# Altium PCB OpenSwitch.PcbDoc
Units mil, origin at the board's own origin, x right, y up, seen from the top; angles counter-clockwise.
Board outline 3835 x 2405 mil, 4 copper layers (Top Layer, Internal Plane 1, Internal Plane 2, Bottom Layer), stack 30.634 mil thick; 73 components, 57 nets, 290 pads, 99 vias.
Unrouted connection lines stored in the file: 2.
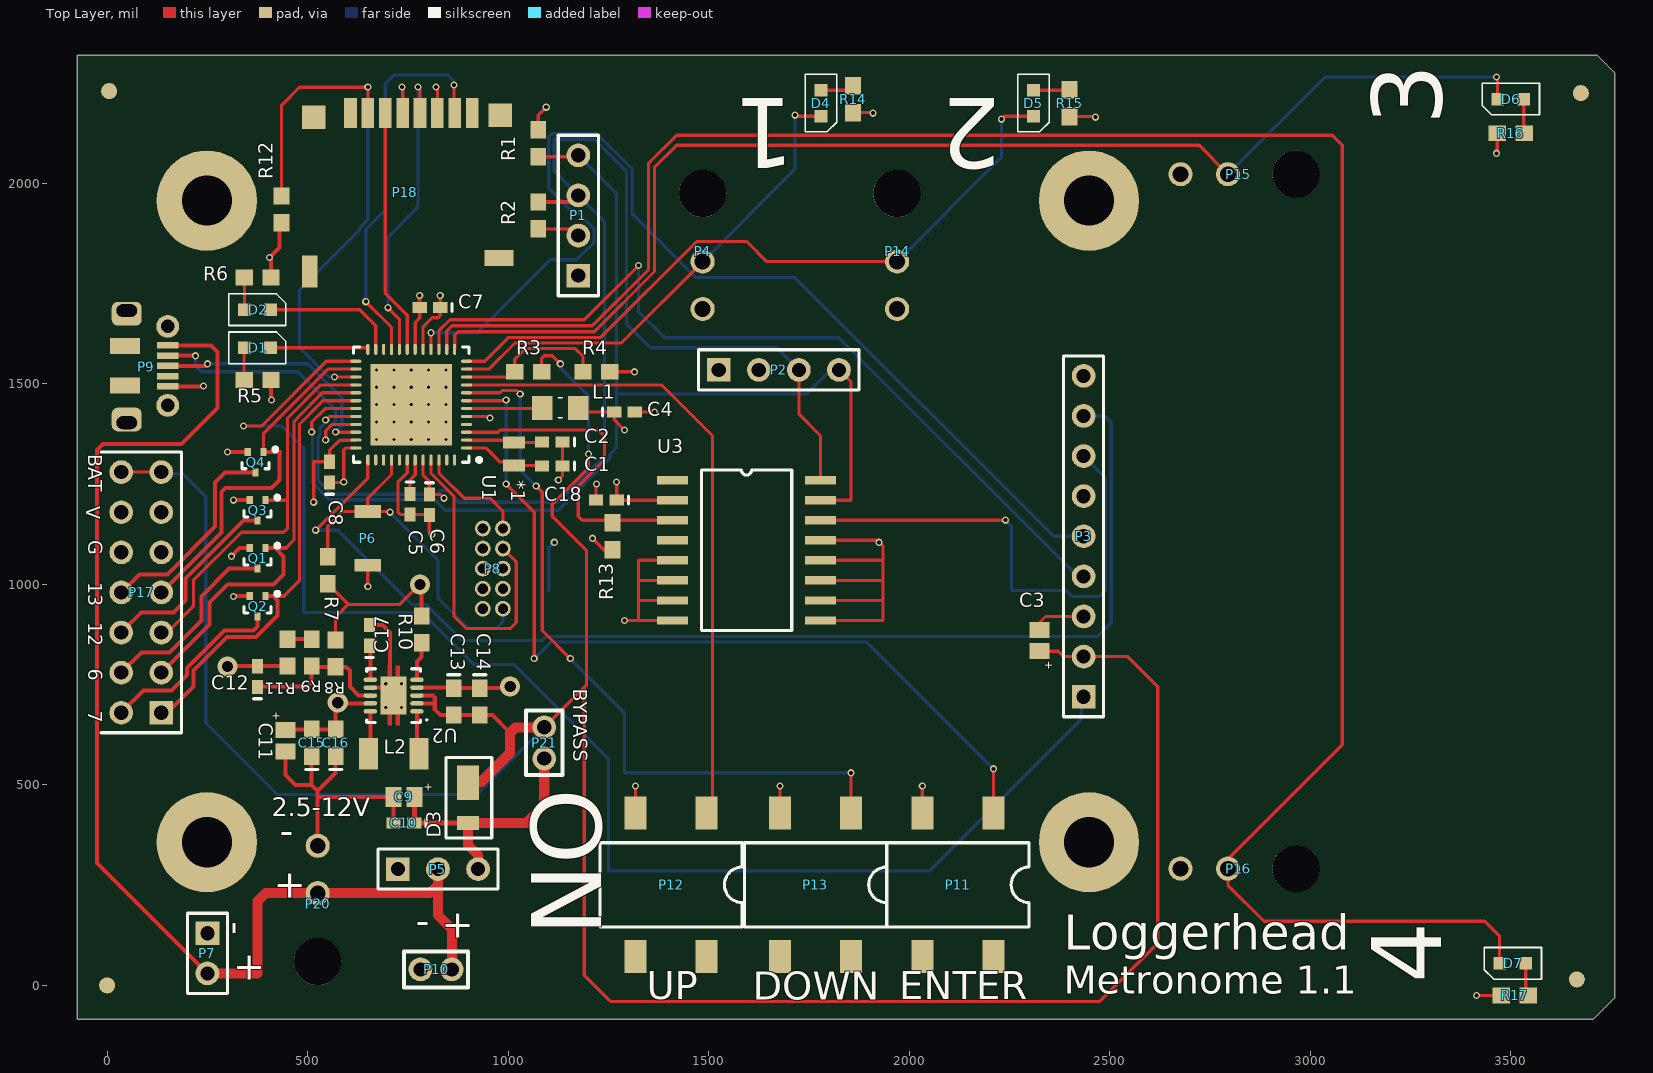
[diagram p0: Top Layer view]
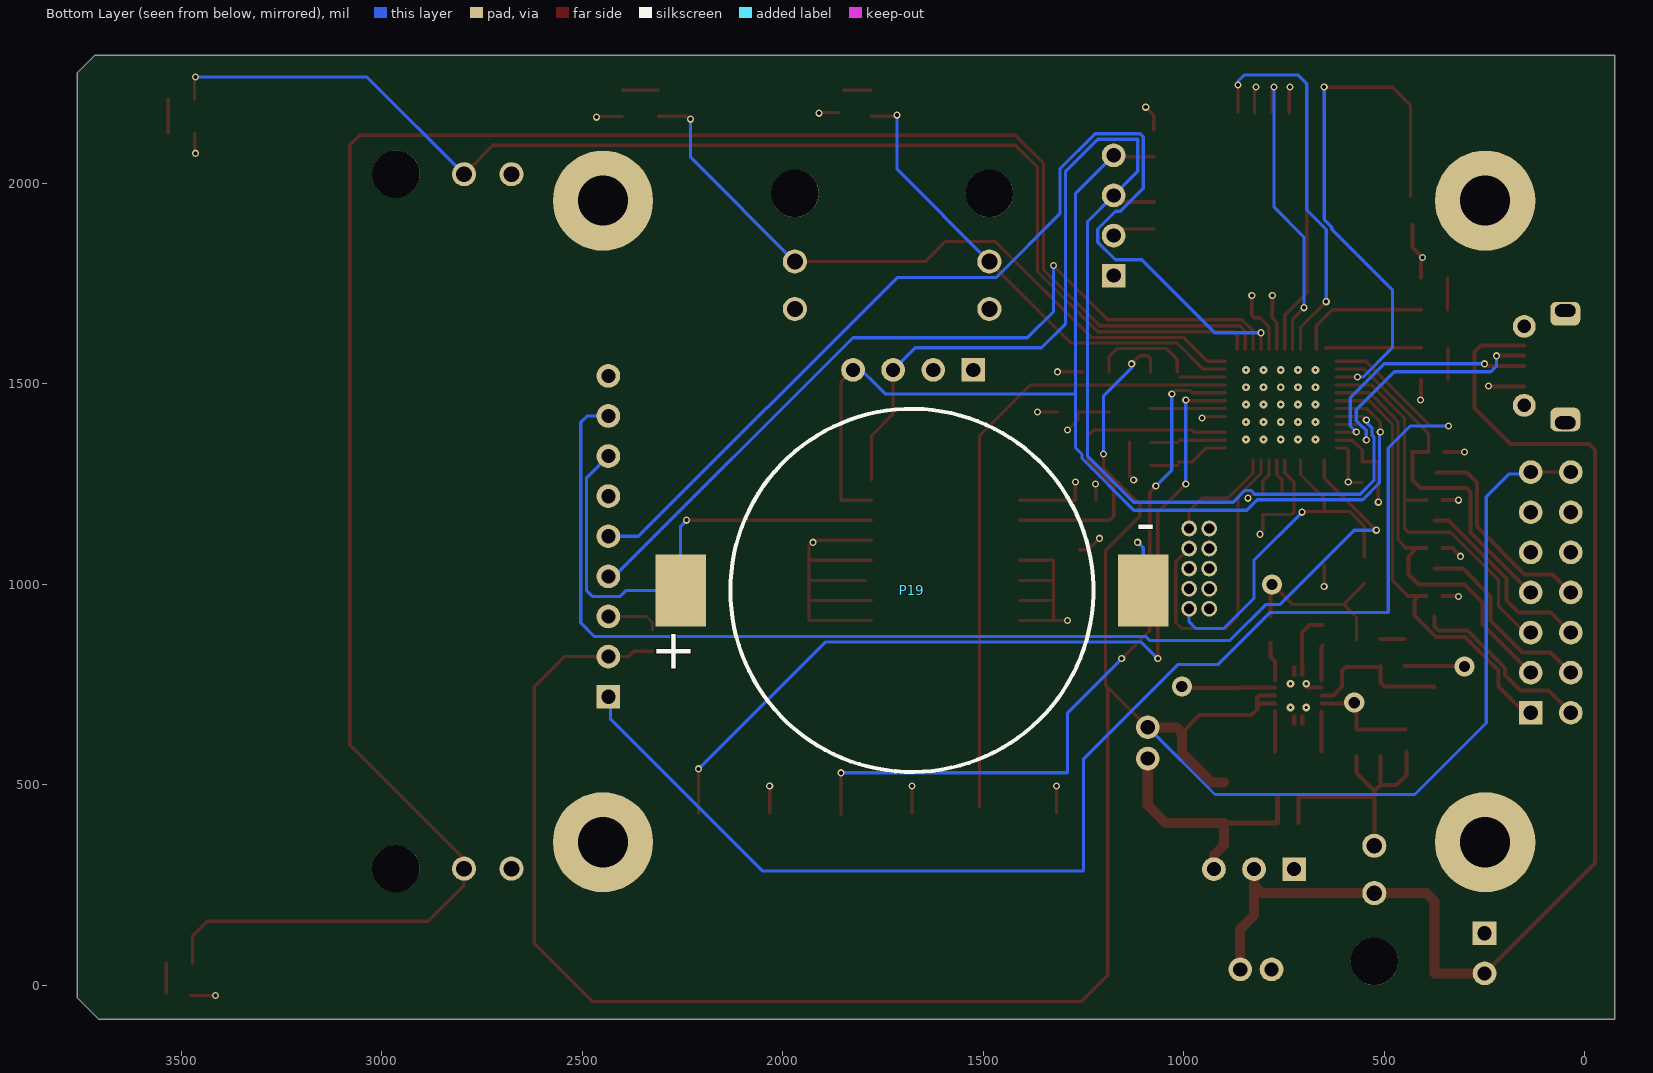
[diagram p1: Bottom Layer view, seen from below]
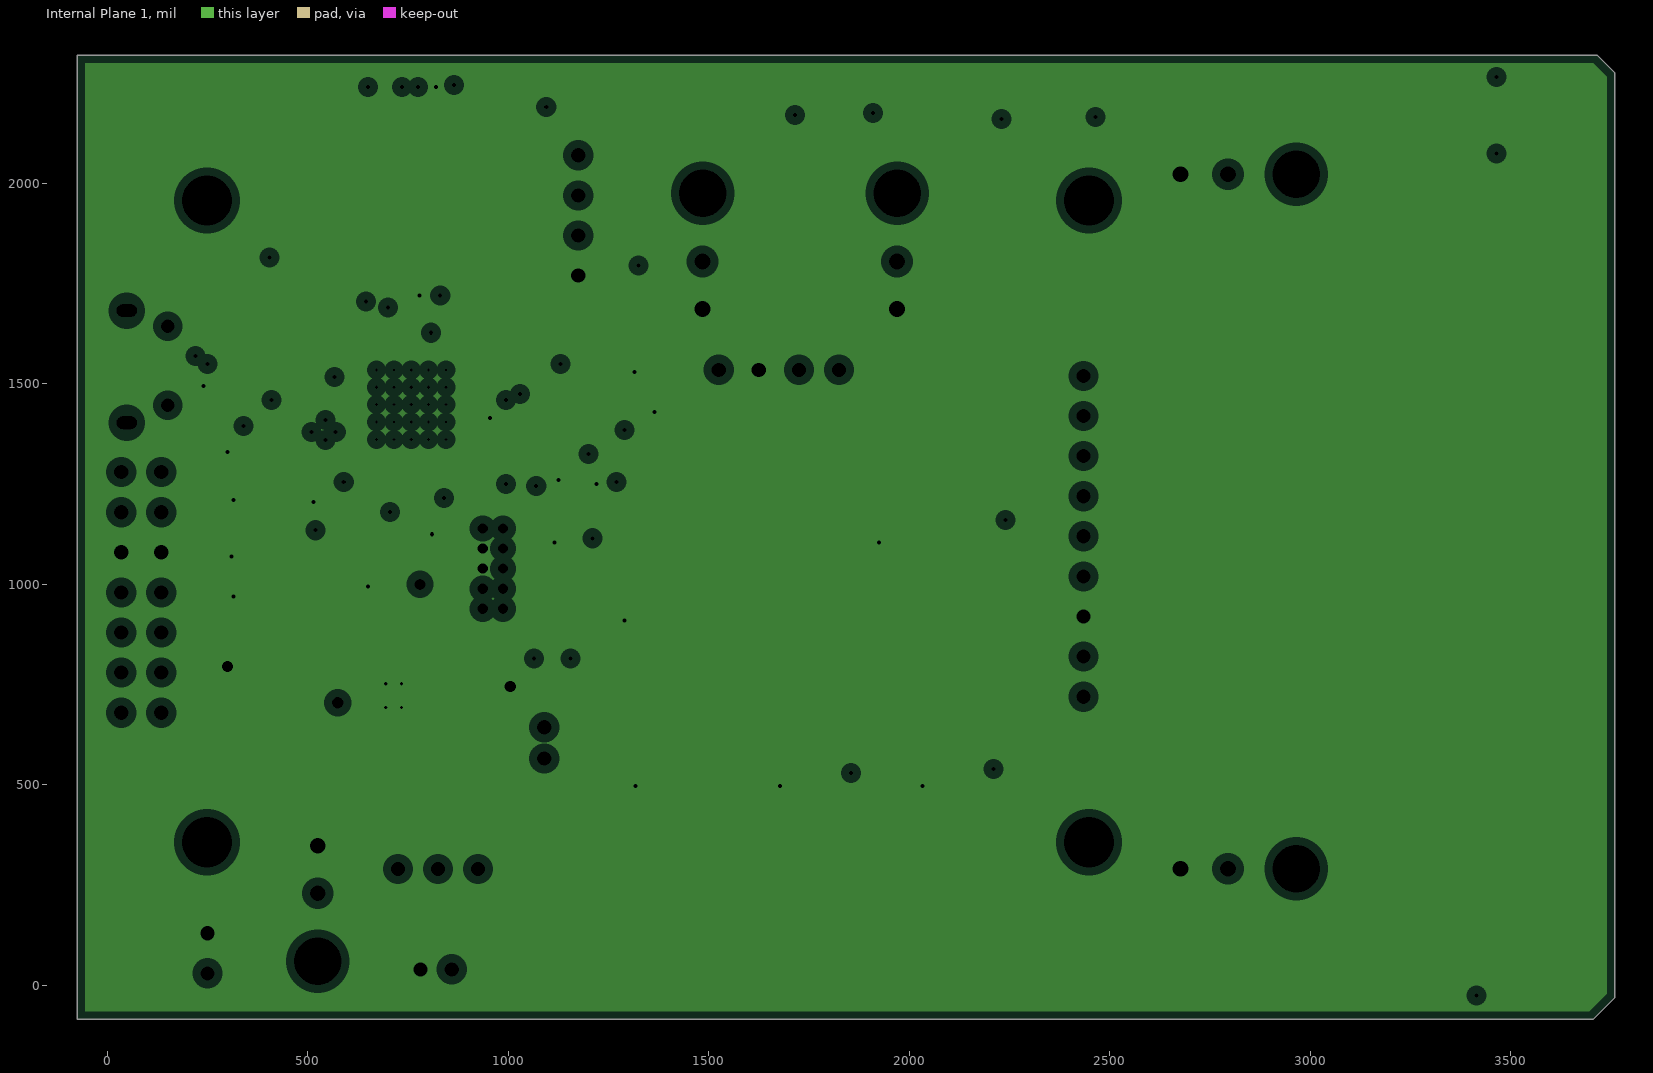
[diagram p2: Internal Plane 1, clearances drawn from the general rule]
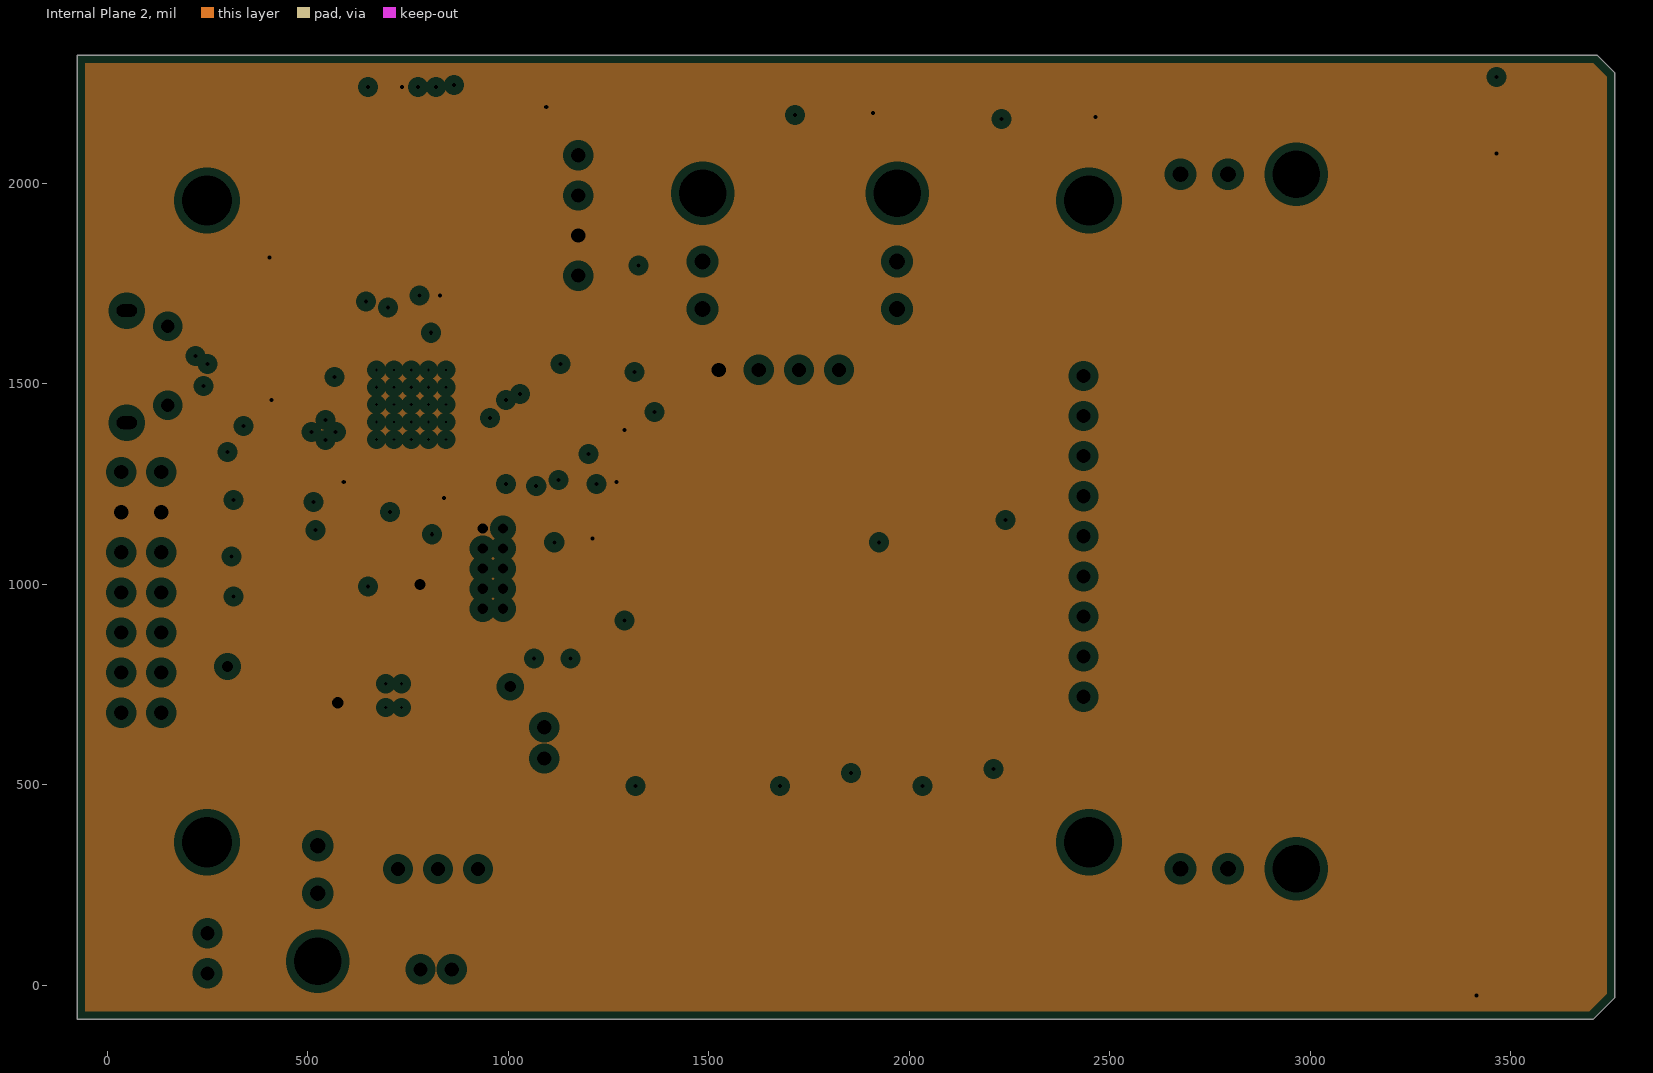
[diagram p3: Internal Plane 2, clearances drawn from the general rule]

## Layer stack, top to bottom
Top Solder: solder mask 0.4, Solder Resist, Dk 3.5
Top Layer: signal copper 1.4
Dielectric 1: core 10, FR-4, Dk 4.2
Internal Plane 1: plane copper 1.417, net DGND
Dielectric 3: prepreg 5, Dk 4.2
Internal Plane 2: plane copper 1.417, net VCC
Dielectric 2: core 10, Dk 4.2
Bottom Layer: signal copper 1.4
Bottom Solder: solder mask 0.4, Solder Resist, Dk 3.5

## Board outline
-75,-85.08 -75,2319.92 3715,2319.92 3760,2274.92 3760,-30.08 3705,-85.08

## Design rules (kind name [scope] priority, off if disabled: settings)
Clearance [All] p1: gap=6
PlaneClearance [All] p1: clearance=20
PlaneConnect [All] p1: planeconnectstyle=Relief reliefexpansion=20 reliefentries=4 reliefconductorwidth=10 reliefairgap=10
PolygonConnect [All] p1: connectstyle=Relief reliefconductorwidth=10 reliefentries=4 polygonreliefangle="90 Angle" airgapwidth=10
RoutingVias [All] p1: holewidth=24 width=12 viastyle="Through Hole" minholewidth=10 minwidth=12 maxholewidth=28 maxwidth=50
SolderMaskExpansion [All] p1: expansion=4
Width [All] p1: maxlimit=50 minlimit=6 preferedwidth=10
27 further rules are at their usual default settings.

## Classes and differential pairs
component class OpenSwitch: *1 C1 C2 C3 C4 C5 C6 C7 C8 C18 D1 D2 D4 D5 D6 D7 L1 P1 P2 P3 P4 P6 P8 P9 P11 P12 P13 P14 P15 P16 P17 P18 P19 Q1 Q2 Q3 Q4 R1 R2 R3 R4 R5 R6 R7 R12 R13 R14 R15 R16 R17 U1 U3
component class OpenSwitch_Power: C9 C10 C11 C12 C13 C14 C15 C16 C17 D3 L2 P5 P7 P10 P20 P21 R8 R9 R10 R11 U2

## Components (designator, comment, footprint, x,y, rotation, side; value= is the part's Value field where it differs from the comment)
*1 "XTAL_ABS06" XTAL-ABS06 1015,1325 r270 top
C1 "22.5pF" 0402 1110,1295 r180 top
C2 "22.5pF" 0402 1110,1355 r180 top
C3 "1uF" Tant0805 2325,859.92 r270 top
C4 "0.1uF" 0402 1290,1430 r0 top
C5 "0.1uF" 0402 755,1200 r270 top
C6 "0.1uF" 0402 803.31,1198.23 r270 top
C7 "0.1 uF" 0402 805,1690 r180 top
C8 "0.1 uF" 0402 555,1280 r90 top
C9 "10uF" Tant0805 740,470 r0 top
C10 "0.1uF" 0402 740,405 r180 top
C11 "47uF" Tant0805 445,610 r90 top
C12 "10pF" 0402 375,770 r90 top
C13 "C0603" 0603 864.33,707.76 r270 top
C14 "C0603" 0603 929.33,707.76 r270 top
C15 "C0603" 0603 510,605 r90 top
C16 "C0603" 0603 570,605 r90 top
C17 "0.1uF" 0402 654.33,872.76 r90 top
C18 "0.1uF" 0402 1245,1209.92 r180 top
D1 "LED_0603" Diode0603 375,1589.92 r0 top
D2 "LED_0603" Diode0603 375,1684.92 r0 top
D3 "Shottky" DFLS130 900,469.92 r270 top
D4 "LED_0603" Diode0603 1780,2200 r270 top
D5 "LED_0603" Diode0603 2310,2200 r270 top
D6 "LED_0603" Diode0603 3500,2210 r180 top
D7 "LED_0603" Diode0603 3505,55 r180 top
L1 "300Ohm" "0805 (M2125) Ferrite" 1130,1440 r0 top
L2 "1uH" Inductor_NLV32T 714.33,577.76 r0 top
P1 "Header 4" HDR1X4 1175,1769.92 r90 top
P2 "Display" HDR1X4 1525,1534.92 r0 top
P3 "GPS" HDR1X9 2435,719.92 r90 top
P4 "MicroFit3_2pin_RT" "Microfit 3 - 2 pin RT" 1485,1804.92 r270 top
P5 "switch" HDR1X3 725,289.92 r0 top
P6 "Tactile" Tactile-B3U-1000 650,1114.92 r90 top
P7 "Molex" HDR1X2 250,129.92 r270 top
P8 "Cortex Debug" Header_2x5_50mil 936.93,939.29 r0 top
P9 "Program" microUSB-B 100,1544.92 r270 top
P10 "JST" HDR_2x1_2mm 860,39.92 r90 top
P11 "pushbutton" SOP4 2210,429.92 r270 top
P12 "pushbutton" SOP4 1495,429.92 r270 top
P13 "pushbutton" SOP4 1855,429.92 r270 top
P14 "MicroFit3_2pin_RT" "Microfit 3 - 2 pin RT" 1970,1804.92 r270 top
P15 "MicroFit3_2pin_RT" "Microfit 3 - 2 pin RT" 2795,2022.91 r180 top
P16 "MicroFit3_2pin_RT" "Microfit 3 - 2 pin RT" 2795,291.02 r180 top
P17 "Header 7X2" HDR2X7 135,679.92 r90 top
P18 "microSD Hirose" "DM3D microSD" 670,2049.92 r270 top
P19 "CoinCellHolder" CoinCellHolder 2255,984.92 r180 bottom
P20 "MicroFit3_2pin_RT" "Microfit 3 - 2 pin RT" 525,229.92 r90 top
P21 "HDR_2x1_2mm" HDR_2x1_2mm 1090,564.92 r0 top
Q1 "DMN5L06TK-7" SOT-523 375,1065 r270 top
Q2 "DMN5L06TK-7" SOT-523 375,945 r270 top
Q3 "DMN5L06TK-7" SOT-523 375,1185 r270 top
Q4 "DMN5L06TK-7" SOT-523 370,1305 r270 top
R1 "4.7k" 3-0603 1075,2100 r90 top
R2 "4.7k" 3-0603 1075,1920 r270 top
R3 "100k" 3-0603 1050,1530 r0 top
R4 "100k" 3-0603 1220,1530 r180 top
R5 "330X" 3-0603 375,1509.92 r180 top
R6 "330X" 3-0603 375,1764.92 r180 top
R7 "10K" 3-0603 550,1035 r90 top
R8 "1M" 3-0603 569.33,827.76 r90 top
R9 "161K" 3-0603 510,830 r270 top
R10 "1M" 3-0603 784.33,887.76 r270 top
R11 "0X" 3-0603 450,830 r90 top
R12 "10k" 3-0603 435,1934.92 r90 top
R13 "10k" 3-0603 1260,1120 r90 top
R14 "330X" 3-0603 1860,2210 r90 top
R15 "330X" 3-0603 2400,2200 r90 top
R16 "330X" 3-0603 3500,2125 r0 top
R17 "330X" 3-0603 3510,-25 r0 top
U1 "ATSAMD21GA-MUT" QFN127P600-8N 758.31,1448.23 r180 top
U2 "Buck-Boost 2.5-12V" TPS63060 714.33,722.76 r180 top
U3 "DS3231" DS3231 1410,1259.92 r0 top

## Footprints (in the part's own frame and the unit in brackets; to place one, negate y for a bottom-side part, rotate by r counter-clockwise, add the part's x,y. Pads: shape width x height; smd on the part's side, far side on the other; paste and mask are expansions set on the pad)
3-0603 [mm] "Chip Resistor; Body 1.6 x 0.9 mm (LxW typ)"
  rect 1.1x1 smd: 1(-0.85,0) 2(0.85,0)
0402 [mm] "Chip Capacitor; Body 1.0 x 0.5 mm (LxW typ)"
  rect 0.9x0.7 smd: 1(-0.65,0) 2(0.65,0)
  silkscreen extent -1.4,-0.25 -1.4,0.25
0603 [mm] "Chip Capacitor; Body 1.6 x 0.8 mm (LxW typ)"
  rect 1.1x1 smd: 1(-0.85,0) 2(0.85,0)
  silkscreen extent -1.7,-0.4 -1.7,0.4
"0805 (M2125) Ferrite" [mm] "Chip Resistor; Body 2.0 x 1.3 mm (LxW typ)"
  rect 1.3x1.5 smd: 1(-1.15,0) 2(1.15,0)
  silkscreen extent -0.13,-0.64 0.13,0.64, body extent -1.15,-0.72 1.15,0.73, height 0.81
CoinCellHolder [mm] "MPD BU2032SM-BT-GTR"
  rect 3.2x4.572 smd: 1(0,0) 2(29.3,0)
  silkscreen extent 3.15,-11.5 26.15,11.5
DFLS130 [mm] "Diode"
  rect 0.9x1.4 smd: A(1.65,0)
  rect 2.2x1.4 smd: K(-0.9,0)
  silkscreen extent -2.5,-1.4 2.6,1.5
Diode0603 [mm]
  rect 0.8x0.8 smd: A(-0.825,0) K(0.825,0)
  silkscreen extent -1.83,-1 1.8,1
"DM3D microSD" [mm] "MICROSD_HIROSE Push-Pull"
  rect 1.5x1.5 smd: 0(-3.048,7.874) 0(-2.921,-3.937)
  rect 1x1.85 smd: 0(6,7.8)
  rect 2x1 smd: 0(6.85,-4.191)
  rect 1.9x0.8 smd: 1(-3.188,-1.601) 2(-3.188,-0.501) 3(-3.188,0.599) 4(-3.188,1.699) 5(-3.188,2.799) 6(-3.188,3.899) 7(-3.188,4.999) 8(-3.188,6.099)
  body extent -3.65,-4.45 7.8,7.5, height 1.55
DS3231 [mm]
  rect 1.98x0.53 smd: 1(0,0) 2(0,-1.27) 3(0,-2.54) 4(0,-3.81) 5(0,-5.08) 6(0,-6.35) 7(0,-7.62) 8(0,-8.89) 9(9.37,-8.89) 10(9.37,-7.62) 11(9.37,-6.35) 12(9.37,-5.08) 13(9.37,-3.81) 14(9.37,-2.54) 15(9.37,-1.27) 16(9.37,0)
  silkscreen extent 1.83,-9.53 7.54,0.64
HDR1X2 [mm] "Connector; Header; 2 Position"
  rect 1.5x1.5 hole 0.9: 1(0,0)
  round 1.5 hole 0.9: 2(2.54,0)
  silkscreen extent -1.27,-1.27 3.81,1.27
HDR1X3 [mm] "Connector; Header; 3 Position"
  rect 1.5x1.5 hole 0.9: 1(0,0)
  round 1.5 hole 0.9: 2(2.54,0) 3(5.08,0)
  silkscreen extent -1.27,-1.27 6.35,1.27
HDR1X4 [mm] "Connector; Header; 4 Position"
  rect 1.5x1.5 hole 0.9: 1(0,0)
  round 1.5 hole 0.9: 2(2.54,0) 3(5.08,0) 4(7.62,0)
  silkscreen extent -1.27,-1.27 8.89,1.27
HDR1X9 [mm] "Connector; Header; 9 Position"
  rect 1.5x1.5 hole 0.9: 1(0,0)
  round 1.5 hole 0.9: 2(2.54,0) 3(5.08,0) 4(7.62,0) 5(10.16,0) 6(12.7,0) 7(15.24,0) 8(17.78,0) 9(20.32,0)
  silkscreen extent -1.27,-1.27 21.59,1.27
HDR2X7 [mm] "Connector; Header; 7x2 Position"
  rect 1.5x1.5 hole 0.9: 1(0,0)
  round 1.5 hole 0.9: 2(0,2.54) 3(2.54,0) 4(2.54,2.54) 5(5.08,0) 6(5.08,2.54) 7(7.62,0) 8(7.62,2.54) 9(10.16,0) 10(10.16,2.54) 11(12.7,0) 12(12.7,2.54) 13(15.24,0) 14(15.24,2.54)
  silkscreen extent -1.27,-1.27 16.51,3.81
HDR_2x1_2mm [mm]
  round 1.5 hole 0.9: 1(0,0.016) 2(0,2)
  silkscreen extent -1.14,-1.02 1.14,3.05
Header_2x5_50mil [mm]
  round 1 hole 0.65: 1(0,0) 2(1.27,0) 3(0,1.27) 4(1.27,1.27) 5(0,2.54) 6(1.27,2.54) 7(0,3.81) 8(1.27,3.81) 9(0,5.08) 10(1.27,5.08)
Inductor_NLV32T [mm]
  rect 1.2x2 smd: 1(-1.6,0) 2(1.6,0)
"Microfit 3 - 2 pin RT" [mm]
  round 3 hole 3: 0(-4.32,0)
  round 1.524 hole 1: 1(0,0) 2(3,0)
microUSB-B [mm]
  rect 0.4x1.35 smd: 1(-1.3,1.3) 2(-0.65,1.3) 3(0,1.3) 4(0.65,1.3) 5(1.3,1.3)
  rrect50% 1.5x1.9 hole 0.8 slot 1.3 at 90 deg copper offset 0.2,0: ""(-3.5,-1.3)
  round 1.45 hole 0.85: ""(-2.5,1.3) ""(2.5,1.3)
  rect 1x1.9 smd: ""(-1.25,-1.4) ""(1.25,-1.4)
  rrect50% 1.5x1.9 hole 0.8 slot 1.3 at 90 deg copper offset -0.2,0: ""(3.6,-1.3)
  body extent -4.1,-4.07 4.1,1.36, height 2.68
QFN127P600-8N [mm]
  oval 0.7x0.2 smd: 1(-3.5,2.75) 2(-3.5,2.25) 3(-3.5,1.75) 4(-3.5,1.25) 5(-3.5,0.75) 6(-3.5,0.25) 7(-3.5,-0.25) 8(-3.5,-0.75) 9(-3.5,-1.25) 10(-3.5,-1.75) 11(-3.5,-2.25) 12(-3.5,-2.75) 25(3.5,-2.75) 26(3.5,-2.25) 27(3.5,-1.75) 28(3.5,-1.25) 29(3.5,-0.75) 30(3.5,-0.25) 31(3.5,0.25) 32(3.5,0.75) 33(3.5,1.25) 34(3.5,1.75) 35(3.5,2.25) 36(3.5,2.75)
  oval 0.2x0.7 smd: 13(-2.75,-3.5) 14(-2.25,-3.5) 15(-1.75,-3.5) 16(-1.25,-3.5) 17(-0.75,-3.5) 18(-0.25,-3.5) 19(0.25,-3.5) 20(0.75,-3.5) 21(1.25,-3.5) 22(1.75,-3.5) 23(2.25,-3.5) 24(2.75,-3.5) 37(2.75,3.5) 38(2.25,3.5) 39(1.75,3.5) 40(1.25,3.5) 41(0.75,3.5) 42(0.25,3.5) 43(-0.25,3.5) 44(-0.75,3.5) 45(-1.25,3.5) 46(-1.75,3.5) 47(-2.25,3.5) 48(-2.75,3.5)
  rect 5.15x5.15 smd paste-1.194: 49(0,0)
  silkscreen extent -4.43,-3.65 3.65,3.65, body extent -3.5,-3.5 3.5,3.5, height 0.85
SOP4 [mm]
  rect 2.1x1.4 smd: 1(0,0) 2(0,-4.5) 3(9.1,-4.5) 4(9.1,0)
  silkscreen extent 1.89,-6.75 7.21,2.25
SOT-523 [mm] "For Diodes Inc MOSFET DMN5L06TK"
  rect 0.51x0.4 smd: 1(-0.65,0.5) 2(-0.65,-0.5) 3(0.65,0)
  silkscreen extent -0.92,-0.85 0.42,1.38, body extent -0.43,-0.85 0.42,0.85, height 0.8
Tactile-B3U-1000 [mm]
  rect 0.8x1.7 smd: 1(-1.7,0) 2(1.7,0)
Tant0805 [mil]
  rect 40x50 smd: 1(-26.5,0) 2(26.5,0)
TPS63060 [mm] "buck-boost 2.5-12V input"
  oval 0.85x0.28 smd paste-0.025 mask+0.07: 1(-1.475,1) 2(-1.475,0.5) 3(-1.475,0) 4(-1.475,-0.5) 5(-1.475,-1) 6(1.475,-1) 7(1.475,-0.5) 8(1.475,0) 9(1.475,0.5) 10(1.475,1)
  rect 1.65x2.4 smd paste-0.825 mask+0.07: 11(0,0)
  Top Layer region: -0.39,-1.9 -0.11,-1.9 -0.11,-1.2 -0.39,-1.2
  Top Layer region: 0.39,-1.2 0.11,-1.2 0.11,-1.9 0.39,-1.9
  Top Layer region: 0.39,1.9 0.11,1.9 0.11,1.2 0.39,1.2
  Top Layer region: -0.39,1.2 -0.11,1.2 -0.11,1.9 -0.39,1.9
  silkscreen extent -2.15,-1.7 1.7,1.7, body extent -1.55,-1.55 1.55,1.55, height 1
XTAL-ABS06 [mm]
  rect 0.75x1.4 smd: 1(-0.725,0) 2(0.725,0)

## Part data
C1 C2 C4 C5 C6 C7 C8 C10 C12 C17 C18: library part C0402, "Ceramic Chip Capacitor - Standard"
C3 C9 C11: library part Tant0805
C13 C14 C15 C16: "Ceramic Chip Capacitor - Standard"
D3: library part DFLS130
L1: library part "Ferrite 0805(M2125) 3A", "Ferrite 25mOhm@DC,  60 Ohm@100MHz"
L2: library part Inductor_NLV32T
P1: "Header, 4-Pin"
P2: library part "Header 4", "Header, 4-Pin"
P3: library part "Header 9", "Header, 9-Pin"
P5: library part "Header 3", "Header, 3-Pin"
P6: library part Tactile_B3U-1000
P7: library part "Header 2", "Header, 2-Pin"
P8: library part CortexDebug
P9: library part microUSB-B
P10: library part HDR_2x1_2mm
P17: "Header, 7-Pin, Dual row"
Q1 Q2 Q3 Q4: library part "FET DMN5L06TK-7", "Ultra-low leakage Enhanced MOSFET"
R1 R2 R3 R4 R5 R6 R7 R8 R9 R10 R11 R12 R13 R14 R15 R16 R17: library part ERJ3RK, "Precision Thick Film Chip Resistor, 10 Ohm to 1M Ohm Range, 1% and 0.5% Tolerance, 0603 Size, 0.063 W"
U1: library part ATSAMD21G18
U2: library part TPS63060, "TPS63060"

## Free pads (board coordinates)
  round 40 smd paste-20 mask+5: 0(0,0) 0(5,2230) 0(3665,15) 0(3675,2225)
  round 250 hole 125: 0(248.58,356.97) 0(248.58,1956.97) 0(2448.58,356.97) 0(2448.58,1956.97)

## Via types
v1: diameter 18, hole 10, Top Layer to Bottom Layer, 66 vias
v2: diameter 19.68, hole 7.87, Top Layer to Bottom Layer, 29 vias
v3: diameter 50, hole 28, Top Layer to Bottom Layer, 4 vias

## Nets (pads, with @x,y where several pads share a name; then routed paths per layer and width w, separated by ;. In a path a pad name is that pad's centre, name@x,y a point inside that pad or via, vN(x,y) a via of type N, cw(c..) or ccw(c..) an arc to the next point about the centre after c; other vN are vias at no path point)
A4: R3.1 R4.2 U1.10 | length 371.7
  Top Layer w8: U1.10 R3.1@1008.74,1517.13 ; R3.1 1016.54,1561.54 1043,1588 1167,1588 1186.54,1568.46 R4.2
BATT_BACK: P3.7 P19.1 U3.14 | length 1247.5
  Top Layer w8: U3.14 v1(2240,1160)
  Bottom Layer w8: v1(2240,1160) 2255,1145 P19.1 2390.08,984.92 2405,970 2475,970 2490,985 2490,1264.92 P3.7
CS: P18.2 R12.2 U1.27 | length 1415.8
  Top Layer w8: R12.2 435,2195 479.72,2239.72 650.28,2239.72 P18.2 ; v1(567.13,1517.13) U1.27
  Bottom Layer w8: v1(567.13,1517.13) 552.87,1517.13 480,1590 480,1735 631,1886 631,1890.8 650,1909.8 v1(650,2240)
D6: P17.3 Q1.1 U1.29 | length 1072.6
  Top Layer w8: 445.59,1090.59 466,1111 466,1405.8 475,1414.8 475,1416.21 536.54,1477.76 U1.29
  Top Layer w10: P17.3 255,899.92 255,955 300,1000 415,1000 440,1025 440,1070 419.41,1090.59 ; Q1.1 419.41,1090.59 ; 445.59,1090.59 419.41,1090.59
D6_GND: P17.4 Q1.3 | length 482.6
  Top Layer w10: P17.4 85.08,830 155,830 235,910 235,970 304.41,1039.41 Q1.3
D7: P17.1 Q2.1 U1.30 | length 1122.7
  Top Layer w8: 440.59,970.59 480,1010 480,1400 538.07,1458.07 U1.30
  Top Layer w10: P17.1 149.92,679.92 215,745 215,785 299,869 371.63,869 425,922.37 425,960 414.41,970.59 ; Q2.1 414.41,970.59 ; 440.59,970.59 414.41,970.59
D7_GND: P17.2 Q2.3 | length 463.8
  Top Layer w10: P17.2 90.08,735 160,735 199,774 199,791.63 292.37,885 365,885 375,895 Q2.3
D12: P17.5 Q3.1 U1.28 | length 981.1
  Top Layer w8: P17.5@149.92,879.92 215,945 215,1010 335,1130 440,1130 450,1140 450,1210 ; Q3.1@395.28,1210 450,1210 ; U1.28 532.44,1497.44 450,1415 450,1210
  Top Layer w10: Q3.1 Q3.1@395.28,1210
D12_GND: P17.6 Q3.3 | length 488.1
  Top Layer w10: P17.6@59.92,879.92 47.42,892.42 85,930 165,930 195,960 195,1015 339.41,1159.41 Q3.3
D13: P17.7 Q4.1 U1.26 | length 924.2
  Top Layer w8: Q4.1 389.68,1375.9 550.6,1536.81 U1.26
  Top Layer w10: P17.7 285,1129.92 285,1230 295,1240 410,1240 430,1260 430,1330 430.59,1330.59 Q4.1
D13_GND: P17.8 Q4.3 | length 523.5
  Top Layer w10: P17.8 80.08,1025 150,1025 269,1144 269,1254 294.41,1279.41 Q4.3
D+: P9.3 U1.34 | length 612.9
  Top Layer w8: v1@570,1379.33 U1.34
  Top Layer w10: P9.3 244.92,1544.92 v1(250,1550)
  Bottom Layer w8: v1(250,1550) 500,1550 585,1465 585,1395 v1(570,1380)
D-: P9.2 U1.33 | length 680.2
  Top Layer w8: v1(545,1360) 545,1382.48 561.54,1399.02 U1.33
  Top Layer w10: P9.2 v1@219.49,1570.51
  Bottom Layer w8: v1(220,1570) 220,1545 235,1530 475,1530 570,1435 570,1408.13 552.87,1391 551,1391 545,1385 v1(545,1360)
DGND: C1.1 C2.1 C3.1 C4.2 C5.2 C6.2 C7.2 C8.2 C9.1 C10.2 C11.1 C12.2 C13.1 C14.1 C15.1 C16.1 C17.2 C18.2 P1.1 P2.2 P3.3 P4.2 P6.1 P7.1 P8.5 P8.7 P9.5 P10.2 P11.2 P12.2 P13.2 P14.2 P15.2 P16.2 P17.9 P17.10 P18.6 P19.2 P20.2 Q1.2 Q2.2 Q3.2 Q4.2 R4.1 R11.1 U1.5 U1.18 U1.35 U1.42 U2.4 U2.7 U2.11 U3.5 U3.6 U3.7 U3.8 U3.9 U3.10 U3.11 U3.12 U3.13 | length 4581.5
  Top Layer w8: v1(515,1205) 515,1305 515.59,1305.59 C8.2 555,1335 579.65,1359.65 U1.35 ; v1(650,995) P6.1 ; U1.42 748.46,1278.46 725,1255 725,1180 730.59,1174.41 C5.2 801.54,1174.41 C6.2 803.31,1131.69 v1(810,1125) ; U1.18 768.15,1653.15 779.41,1664.41 C7.2 ; P18.6 v1@823.5,2236.5 ; U1.5 v1@955,1418.7 ; v1(1125,1260) 1135.59,1270.59 C1.1 C2.1 ; C18.2 v1@1219.41,1244.41 ; R4.1 v1(1315,1530) ; v1@1290.08,909.92 U3.8 ; C4.2 v1(1365,1430) ; P12.2 v1(1317.83,497.17) ; 1324.92,910 1324.92,959.92 ; 1330.08,1009.92 U3.6 ; U3.7 1324.92,959.92 ; U3.5 1324.92,1059.92 1324.92,959.92 ; P13.2 v1(1677.83,497.17) ; U3.9 1934.92,909.92 1934.92,959.92 ; U3.10 1934.92,959.92 ; U3.12 1934.92,1059.92 ; U3.13 1919.92,1109.92 1934.92,1094.92 1934.92,959.92 ; U3.11@1793.98,1010 1935,1010 ; P11.2 v1(2032.83,497.17) ; C3.1 2325,905 2339.92,919.92 P3.3
  Top Layer w10: P9.5 v1@243.74,1493.74 ; v3(300,795) 301.54,796.54 R11.1 ; v1@304.41,1330.59 Q4.2 ; v1(310,1070) 330.59,1090.59 Q1.2 ; v1(315,970) 315.59,970.59 Q2.2 ; v1@315.59,1210.59 Q3.2 ; C11.1 445,525 470,500 510,500 ; C15.1 510,500 ; P20.2 525,470 ; C16.1 570,530 525,485 ; C17.2 686.65,898.35 705,880 705,780 ; U2.7 U2.11@694.65,742.44 ; C9.1 525,470 ; C10.2 C9.1@714.41,469.09 ; U2.4 C13.1@863.11,742.44 ; C7.2 v1(779.41,1720.59) ; C13.1 C14.1 v3@1001.22,741.22 ; 510,500 525,485 ; 525,470 525,485
  Bottom Layer w8: P19.2 1101.46,1091.46 v1(1115,1105)
  other v1: 1290,910 1925,1105 315,1210 1220,1250 300,1330 955,1415 240,1495 820,2240
  other v2: 694.65,693.23 734.02,693.23 694.65,752.28 734.02,752.28
  other v3: 1005,745
DN-TX: P13.1 U1.8 | length 1862.5
  Top Layer w8: U1.8 979.31,1477.76 985,1483.44 1021.56,1483.44 v1(1030,1475) ; v1(1070,1245) 1085,1230 1085,885 v1(1155,815) ; P13.1@1855,424.92 P13.1 v1(1855,530)
  Bottom Layer w8: v1(1030,1475) 1030,1285 v1(1070,1245) ; v1(1155,815) 1290,680 1290,530 v1(1855,530)
ENT-RST: P11.1 U1.7 | length 2165.8
  Top Layer w8: U1.7 v1@990,1458.07 ; v1(995,1250) 1065,1180 v1(1065,815) ; P11.1 v1(2210,540)
  Bottom Layer w8: v1@995,1255 v1(995,1460) ; v1(1065,815) 1106,856 1894,856 v1(2210,540)
GPSEN: P3.8 U1.37 | length 2921
  Top Layer w8: v1(520,1135) 650.04,1265.04 U1.37
  Bottom Layer w8: v1(520,1135) 575,1135 760,950 795,950 885,860 1085,860 1095,870 2470,870 2504,904 2504,1404 2488.08,1419.92 P3.8
INT: R13.2 U1.3 U3.3 | length 818.6
  Top Layer w8: U1.3 974.33,1379.33 980,1385 1225,1385 1240,1370 1240,1310.2 1175,1245.2 1175,1170 1185.08,1159.92 U3.3
LED1: D1.K U1.24 | length 238.7
  Top Layer w8: D1.K U1.24@646.14,1589.92
LED2: D2.K U1.23 | length 337.9
  Top Layer w8: D2.K 630.08,1684.92 669.72,1645.28 U1.23
MISO: P18.7 U1.21 | length 973.5
  Top Layer w8: v1(645,1705) 709.09,1640.91 U1.21 ; P18.7@865,2177.24 v1(865,2245)
  Bottom Layer w8: v1(645,1705) 645,1885 693.58,1933.58 693.58,2248.58 715,2270 850,2270 865,2255 v1(865,2245)
MOSI: P18.3 U1.19 | length 612.1
  Top Layer w8: P18.3 693.58,1726.42 748.46,1671.54 U1.19
Net*1_1: *1.1 C2.2 U1.2 | length 183
  Top Layer w8: U1.2 *1.1@1011.18,1359.65 ; *1.1 C2.2@1082.95,1353.54
Net*1_2: *1.2 C1.2 U1.1 | length 199.8
  Top Layer w8: U1.1 945.04,1339.96 980,1305 1012.99,1305 *1.2@1013.31,1304.69 ; *1.2 C1.2@1082.95,1296.46
NetC5_1: C5.1 U1.43 | length 90.3
  Top Layer w8: C5.1 755,1260 768.15,1273.15 U1.43
NetC12_1: C12.1 R8.1 R9.2 U2.8 | length 371
  Top Layer w10: C12.1 375.59,745 500,745 510,755 R9.2 ; R9.2@519.29,794.29 R8.1 595.71,794.29 605,785 605,745 627.24,722.76 U2.8
NetC17_1: C17.1 U2.6 | length 85.8
  Top Layer w10: C17.1 656.26,845.24 U2.6
NetD1_A: D1.A R5.2 | length 79
  Top Layer w8: R5.2 D1.A@341.54,1588.94
NetD2_A: D2.A R6.2 | length 79
  Top Layer w8: D2.A R6.2@342.52,1763.94
NetD4_A: D4.A R14.2 | length 69
  Top Layer w8: D4.A R14.2@1849.02,2232.48
NetD5_A: D5.A R15.2 | length 89
  Top Layer w8: D5.A R15.2@2399.02,2232.48
NetD6_A: D6.A R16.2 | length 84
  Top Layer w8: R16.2@3532.48,2125.98 D6.A
NetD7_A: D7.A R17.2 | length 74
  Top Layer w8: R17.2@3537.48,-19.02 D7.A
NetL1_1: L1.1 U1.6 | length 188.6
  Top Layer w8: U1.6 L1.1@1084.72,1438.39
NetL2_1: L2.1 U2.10 | length 100.7
  Top Layer w10: L2.1@656.26,582.68 U2.10
NetL2_2: L2.2 U2.1 | length 100.7
  Top Layer w10: L2.2@772.4,582.68 U2.1
NetR9_1: R9.1 R11.2 | length 60
  Top Layer w10: R11.2 R9.1
NetR10_2: R10.2 U2.5 | length 97.1
  Top Layer w10: U2.5 772.4,807.4 784.33,819.33 R10.2
PB02: U1.47
PPS: P3.1 U1.25 | length 3510.8
  Top Layer w8: v1(340,1395) 385,1395 546.5,1556.5 U1.25
  Bottom Layer w8: v1(340,1395) 435,1395 490,1340 490,930 785,930 915,800 1015,800 1250,565 1250,290 ; 1250,285 2050,285 2430,665 2430,714.92 P3.1
RELAY1: D4.K P4.1 U1.11 | length 1222.8
  Top Layer w8: U1.11 951.81,1536.81 1017,1602 1282.08,1602 P4.1 ; v1@1717.48,2167.52 D4.K
  Bottom Layer w8: P4.1 1715,2034.92 v1(1715,2170)
RELAY2: D5.K P14.1 U1.12 | length 1764.2
  Top Layer w8: U1.12 941.5,1556.5 1001,1616 1231,1616 1470,1855 1595,1855 1645.08,1804.92 P14.1 ; v1(2230,2160) 2237.52,2167.52 D5.K
  Bottom Layer w8: P14.1 2230,2064.92 v1(2230,2160)
RELAY3: D6.K P15.1 U1.13 | length 3154.9
  Top Layer w8: U1.13 866.57,1621.57 875,1630 1214.8,1630 1365,1780.2 1365,2040 1420,2095 2722.91,2095 P15.1 ; D6.K v1@3467.52,2262.48
  Bottom Layer w8: P15.1 3037.09,2265 3455,2265
  other v1: 3465,2265
RELAY4: D7.K P16.1 U1.14 | length 5407.6
  Top Layer w8: U1.14 846.89,1631.89 860,1645 1210,1645 1350,1785 1350,2050 1420,2120 3055,2120 3080,2095 3080,600 2795,315 P16.1 2795,250 2885,160 3435.04,160 3472.52,122.52 D7.K
RESET: P6.2 P8.2 R7.2 U1.40 | length 896.9
  Top Layer w8: R7.2 550,1145 586.85,1181.85 P6.2 ; v1@705,1181.85 P6.2 ; U1.40 709.09,1274.09 650,1215 P6.2
  Bottom Layer w8: v1(705,1180) 825,1060 825,965 900,890 970,890 986.93,906.93 P8.2
RXD: P3.5 U1.16 | length 2676.9
  Top Layer w8: U1.16 v1(807.52,1627.48)
  Bottom Layer w8: v1(807.52,1627.48) 922.48,1627.48 1104.45,1809.45 1170.43,1809.45 1214.53,1853.55 1214.53,1886.29 1170.43,1930.39 1158.63,1930.39 1101,1988.02 1101,2115.8 1109.2,2124 1220.8,2124 1309,2035.8 1309,1924.35 1468.43,1764.92 1715.08,1764.92 2360.08,1119.92 P3.5
SCK: P18.5 U1.20 | length 761.3
  Top Layer w8: v1@695,1690 v1(700,1690) 728.78,1661.22 U1.20 ; P18.5 v1@780.2,2234.8
  Bottom Layer w8: v1(700,1690) 700,1865 775,1940 v1(775,2240)
SCL: P1.3 P2.3 R2.1 U1.32 U3.16 | length 3322.9
  Top Layer w8: v1(545,1410) 553.7,1418.7 U1.32 ; P2.3 1725,1425 1778.9,1371.1 U3.16
  Top Layer w10: R2.1 P1.3@1158.54,1953.46
  Bottom Layer w8: v1(545,1410) 545,1404.8 531,1390.8 531,1372.87 526,1367.87 526,1259 560,1225 823.13,1225 832.13,1234 847.87,1234 876.87,1205 1125,1205 1240,1320 1240,1904.92 P1.3 1115,2029.92 1115,2110 1215,2110 1295,2030 1295,1650 1355,1590 1669.92,1590 P2.3
SDA: P1.4 P2.4 R1.1 U1.31 U3.15 | length 3020.7
  Top Layer w8: v1(510,1380) 510,1405 543.39,1438.39 U1.31 ; R1.1 P1.4@1171.61,2066.54 ; U3.15 1854.92,1209.92 1854.92,1505 P2.4
  Bottom Layer w8: v1(510,1380) 512,1378 512,1253.2 554.2,1211 817.13,1211 843.13,1185 1124.8,1185 1254,1314.2 1254,1324 1270,1340 1270,1974.92 P1.4 ; 1270,1475 1745,1475 1825,1555 P2.4
SWCLK: P8.8 U1.45 | length 785.9
  Top Layer w8: U1.45 807.52,1277.48 865,1220 865,920 895,890 1005,890 1020,905 1020,1056.22 P8.8
SWDIO: P8.10 U1.46 | length 275.4
  Top Layer w8: U1.46 827.2,1277.8 890,1215 955,1215 986.93,1183.07 P8.10
TXD: P3.4 U1.15 | length 2113.4
  Top Layer w8: U1.15 827.2,1632.2 855,1660 1190,1660 v1(1325,1795) v1@1327.5,1797.5
  Bottom Layer w8: v1(1325,1795) 1325,1680 1390,1615 1825,1615 2420.08,1019.92 P3.4
UP-RX: P12.1 U1.9 | length 1591.8
  Top Layer w8: U1.9 1382.44,1497.44 1509.88,1370 P12.1@1509.88,444.8
V_BATT: P5.2 P7.2 P9.1 P10.1 P20.1 | length 3068.8
  Top Layer w10: P9.1 258.9,1596.1 275,1580 275,1440 185,1350 -10,1350 -25,1335 -25,304.92 P7.2
  Top Layer w25: P7.2 374.92,29.92 374.92,209.92 394.92,229.92 P20.1 804.92,229.92 825,250 ; P5.2 825,250 ; P10.1 859.37,140.63 825,175 825,250
VCC: C4.1 C6.1 C7.1 C8.1 C11.2 C15.2 C16.2 C18.1 L1.2 P1.2 P2.1 P8.9 P17.11 P17.12 P18.4 R1.2 R2.2 R5.1 R6.1 R7.1 R8.2 R10.1 R12.1 R13.1 R14.1 R15.1 R16.1 R17.1 U1.17 U1.36 U1.44 U2.9 U3.2 | length 2140.6
  Top Layer w8: R7.1 601.54,950 ; C8.1 589.41,1254.41 v1(590,1255) 590,1335 594.96,1339.96 U1.36 ; R8.2 569.33,917.8 601.54,950 ; P18.4 v1@736.89,2238.11 ; v3(780,1000) 730,950 601.54,950 ; U1.44 787.83,1272.17 803.31,1256.69 C6.1 831.18,1223.82 v1(840,1215) ; U1.17 787.83,1642.83 810,1665 825,1665 830.59,1670.59 C7.1 v1(830.59,1720.59) ; R2.2 P1.2@1158.39,1886.54 ; R1.2 1075,2170 v1(1095,2190) ; L1.2@1185.28,1430 C4.1 1264.41,1410.59 v1(1290,1385) ; v1(1210,1115) 1238.46,1086.54 R13.1 ; v1@1270.59,1254.41 C18.1 U3.2 ; R14.1 v1@1903.46,2176.54 ; R15.1 v1@2463.46,2166.54 ; v1(3415,-25) R17.1 ; v1@3466.54,2076.54 R16.1
  Top Layer w10: v1(405,1815) 430,1840 R12.1@430,1896.46 ; v1@408.46,1461.54 R5.1 ; R6.1 v1@408.46,1811.54 ; C11.2@446.96,638.46 C15.2 C16.2 v3@570,700 ; v3@586.18,703.07 U2.9 ; R10.1 v3@784.33,995.67
  other v1: 1270,1255 410,1460 3465,2075 2465,2165 1910,2175 735,2240
  other v3: 575,705
VIN: C3.2 C13.2 C14.2 D3.K P3.2 P17.13 P17.14 P21.2 R3.2 U2.2 U2.3 | length 6747.6
  Top Layer w8: P17.14 P17.13 ; R3.2 1083.46,1563.46 1090,1570 1110,1570 v1(1130,1550) ; P21.2 1190,743.66 ; v1(1200,1325) 1200,1290 1110,1200 1110,1170 1195,1085 1195,748.66 1190,743.66 ; C3.2 2371.58,833.42 2385.08,819.92 P3.2 2545.08,819.92 2620,745 2620,105 2475,-40 1255,-40 1190,25 1190,743.66
  Top Layer w10: U2.2 816.93,703.07 ; U2.3 812.24,722.76 816.93,718.07 816.93,703.07 ; 1005,630 960.71,674.29 C14.2 C13.2 830.71,674.29 816.93,688.07 816.93,703.07
  Top Layer w25: D3.K 930.35,505.35 1005,580 1005,630 1018.66,643.66 P21.2
  Bottom Layer w8: P17.13 139.92,1275 190,1275 246,1219 246,654.2 424.2,476 922.34,476 P21.2 ; v1(1130,1550) 1130,1540 1200,1470 v1(1200,1325)
VSWITCH: C9.2 C10.1 D3.A P5.3 P21.1 | length 648.1
  Top Layer w12: C10.1 D3.A ; C10.1@766.5,405.91 C9.2
  Top Layer w25: P5.3 925,325 900,350 D3.A 1044.96,404.96 1090,450 P21.1
pads on no net: P3.6 P3.9 P4.0 P5.1 P8.1 P8.3 P8.4 P8.6 P9. P9.4 P11.3 P11.4 P12.3 P12.4 P13.3 P13.4 P14.0 P15.0 P16.0 P18.0 P18.1 P18.8 P20.0 U1.4 U1.22 U1.38 U1.39 U1.41 U1.48 U1.49 U3.1 U3.4
copper on no net:
  other v2: 671.69,1361.61 715,1361.61 758.31,1361.61 801.61,1361.61 844.92,1361.61 671.69,1404.92 715,1404.92 758.31,1404.92 801.61,1404.92 844.92,1404.92 671.69,1448.23 715,1448.23 758.31,1448.23 801.61,1448.23 844.92,1448.23 671.69,1491.54 715,1491.54 758.31,1491.54 801.61,1491.54 844.92,1491.54 671.69,1534.84 715,1534.84 758.31,1534.84 801.61,1534.84 844.92,1534.84

## Polygon pours and split planes (outlines as drawn)
DGND on Internal Plane 1 (split plane): 3739.9,2266.6 3739.9,-21.75 3696.68,-64.98 -54.9,-64.98 -54.9,2299.82 3706.68,2299.82
VCC on Internal Plane 2 (split plane): 3739.9,2266.6 3739.9,-21.75 3696.68,-64.98 -54.9,-64.98 -54.9,2299.82 3706.68,2299.82

## Silkscreen, mask and mechanical layers (free items; w line width, h text height)
Top Overlay:
  text "1" at 1715,2270 h300 r180
  text "2" at 2230,2270 h300 r180
  text "3" at 3385,2145 h300 r90
  text "BAT" at -60,1325 h60 r270
  text "V" at -65,1195 h60 r270
  text "G" at -60,1110 h60 r270
  text "13" at -60,1005 h60 r270
  text "12" at -60,905 h60 r270
  text "6" at -60,790 h60 r270
  text "BYPASS" at 1150,739.92 h60 r270
  text "7" at -60,685 h60 r270
  text "ON" at 1000,489.92 h300 r270
  text "2.5-12V" at 410,404.92 h80
  text "-" at 430,329.92 h120
  text "+" at 415,194.92 h120
  text "-" at 365,124.92 h120 r90
  text "-" at 770,104.92 h120
  text "+" at 835,94.92 h120
  text "Loggerhead" at 2385,60 h150
  text "4" at 3383.83,5 h300 r90
  text "+" at 315,-10.08 h120
  text "Metronome 1.1" at 2385,-45 h120
  text "UP" at 1345,-58.79 h120
  text "ENTER" at 1975,-58.79 h120
  text "DOWN" at 1610,-60.08 h120
Bottom Overlay:
  text "-" at 1070,1105 h100
  text "+" at 2215,790 h100
Mechanical 1:
  the board outline again, w10
Mechanical 13:
  lines w10: 2360,1609.92 2360,614.92 3720,614.92 3720,1614.92 ; 2360,1614.92 3715,1614.92

## Text inside footprints (layer, text, board x,y; h text height)
C3: Top Overlay "+" at 2340,809.92 h19.68 r270
C9: Top Overlay "+" at 790,485 h19.68
C11: Top Overlay "+" at 430,660 h19.68 r90